# EAGLE board Tiny2 (EAGLE 8.3.2)
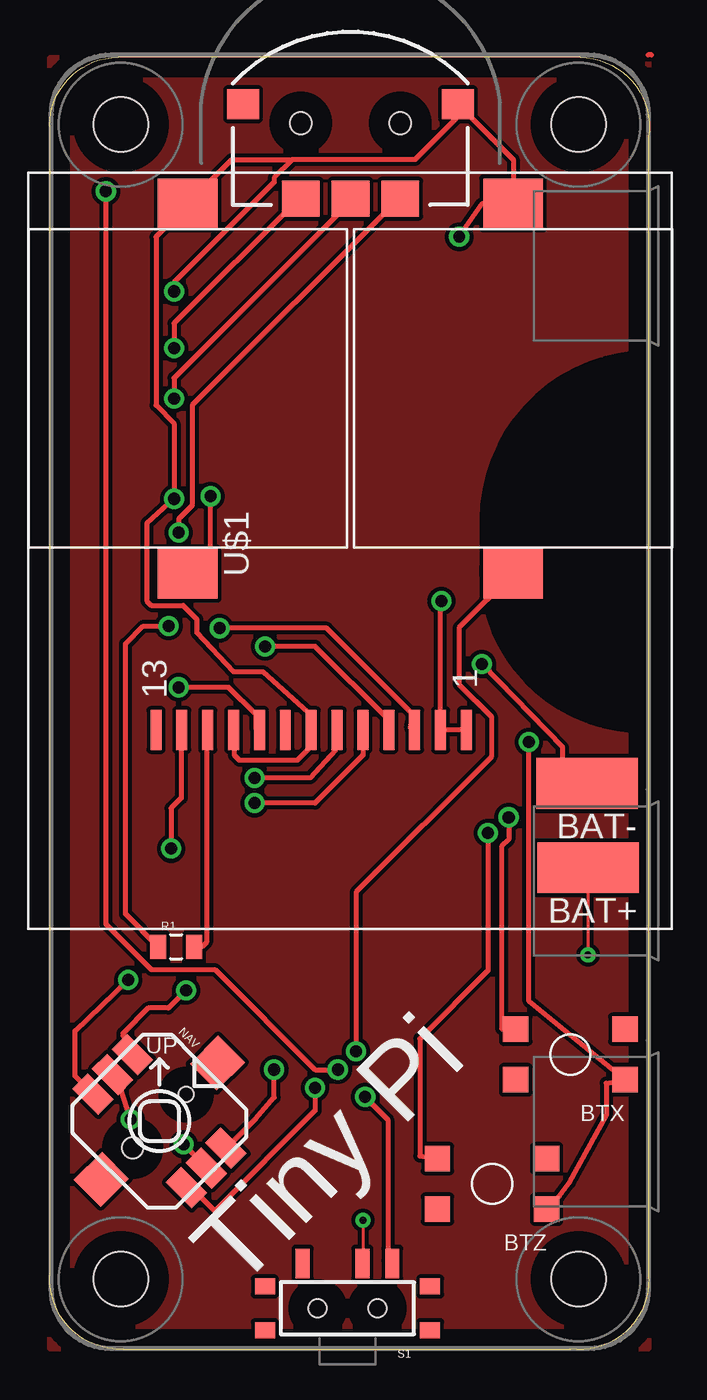
[diagram p0: board, top side]
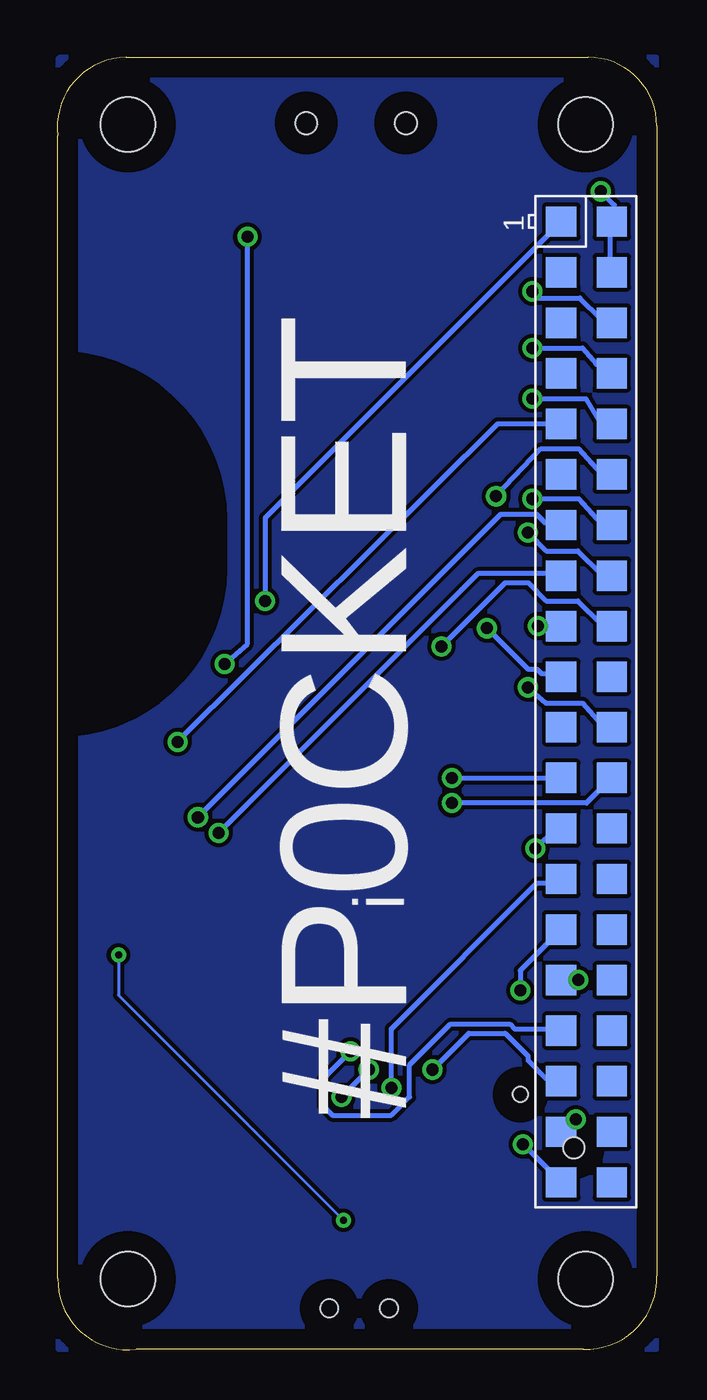
[diagram p1: board, bottom side, seen from below]

Size 30.12 x 64.92 mm. Coordinates in mm from the lower left corner, seen from the top.
Outline: 3.68,0.03 26.16,0.03 arc98 30.1,3.58 30.1,60.99 arc96 26.67,64.92 3.43,64.92 arc90 0,61.49 0,3.71 arc94 3.68,0.03
Copper layers (1*16): Top 0.035mm / dielectric 1.5mm / Bottom 0.035mm
Design rules "default *": minimum track width 10mil, minimum drill 24mil, track to track 8mil, track to pad 8mil, pad to pad 8mil, via to via 8mil, smd to smd 8mil, copper to edge 40mil, drill to drill 8mil, minimum pad ring 10mil, minimum via ring 8mil, stop-mask expansion 4mil, vias tented up to drill 25mil, thermal gap 10mil

## Footprints (pad centres in the part's own frame; a part is rotated, then mirrored left to right if it is on the bottom)
SMD2,54-5,08 = smd 2.54 x 5.08: 1 0,0
7914G = smd 1.27 x 1.27: 1 0,0; 2 0,5.486; 3 2.54,0; 4 2.54,5.486
JOYSTICK_MINI = smd 1.85 x 1.1: A -3.325,1.4; B 3.325,1.4; C -3.325,-1.4; CTR -3.325,0; D 3.325,-1.4; GND 3.325,0 | smd 1.9 x 2: NC 0,4.13; NC@0 0,-4.13 | hole 0.75: 0,1.9 | hole 1.05: 0,-1.9
RASPBERRYPI_BASTELSTUBE_V13_RASPI_BOARD_B+_FULL = smd 1.524 x 1.524: 1 8.382,25.273; 2 8.382,27.813; 3 10.922,25.273; 4 10.922,27.813; 5 13.462,25.273; 6 13.462,27.813; 7 16.002,25.273; 8 16.002,27.813; 9 18.542,25.273; 10 18.542,27.813; 11 21.082,25.273; 12 21.082,27.813; 13 23.622,25.273; 14 23.622,27.813; 15 26.162,25.273; 16 26.162,27.813; 17 28.702,25.273; 18 28.702,27.813; 19 31.242,25.273; 20 31.242,27.813; 21 33.782,25.273; 22 33.782,27.813; 23 36.322,25.273; 24 36.322,27.813; 25 38.862,25.273; 26 38.862,27.813; 27 41.402,25.273; 28 41.402,27.813; 29 43.942,25.273; 30 43.942,27.813; 31 46.482,25.273; 32 46.482,27.813; 33 49.022,25.273; 34 49.022,27.813; 35 51.562,25.273; 36 51.562,27.813; 37 54.102,25.273; 38 54.102,27.813; 39 56.642,25.273; 40 56.642,27.813 | hole 2.75: 3.5,3.5; 3.5,26.5; 61.5,3.5; 61.5,26.5
0805 = smd 0.8 x 1.2: 1 -0.9,0; 2 0.9,0
KPS-1290 = smd 0.7 x 1.5: O -2.25,2.25; P 0.75,2.25; S 2.25,2.25 | smd 1 x 0.8: P$1 -4.15,1.1; P$2 -4.15,-1.1; P$3 4.15,-1.1; P$4 4.15,1.1 | hole 0.9: -1.5,0; 1.5,0
BUZZER-CMT1603 = smd 2.5 x 3: P$1 -9.3,0; P$2 9.3,0
ST7735S-1.44 = smd 2 x 0.55: P$1 -9,-5.85; P$2 -9,-4.55; P$3 -9,-3.25; P$4 -9,-1.95; P$5 -9,-0.65; P$6 -9,0.65; P$7 -9,1.95; P$8 -9,3.25; P$9 -9,4.55; P$10 -9,5.85; P$11 -9,7.15; P$12 -9,8.45; P$13 -9,9.75
NAV_SWITCH = smd 1.9 x 1.8: 1 -2.5,-3.8; 2 2.5,-3.8; T 0,-3.8 | smd 1.6 x 1.5: C 5.4,0.95; NC -5.4,0.95 | hole 1.1: -2.5,0; 2.5,0

## Placement (x,y rotation side)
BAT+  [SMD2,54-5,08]  27.05,24.21 90 top
BAT-  [SMD2,54-5,08]  27,28.45 90 top
BTX  TACTILE-SWITCH-7914G  [7914G]  28.91,13.56 90 top
BTZ  TACTILE-SWITCH-7914G  [7914G]  24.97,7.06 90 top
NAV  [JOYSTICK_MINI]  5.51,11.48 315 top
PI1  RPI-ZERO  [RASPBERRYPI_BASTELSTUBE_V13_RASPI_BOARD_B+_FULL]  30.07,65.05 270 bottom
R1  [0805]  6.35,20.24 0 top
S1  SWITCH_SPDT  [KPS-1290]  14.96,2.08 0 top
SG1  BUZZERSMD  [BUZZER-CMT1603]  6.93,48.29 90 top
SG2  BUZZERSMD  [BUZZER-CMT1603]  23.29,48.29 90 top
U$1  ST7735S-1.44  [ST7735S-1.44]  15.09,40.13 90 top
U$2  NAV_SWITCHSMD  [NAV_SWITCH]  15.11,61.62 0 top

## Library data of the parts
BAT+ BAT- = wirepad
BTX BTZ = GeekAmmo
NAV = SparkFun-Electromechanical; PROD_ID: SWCH-09905
PI1 = RPI-Zero
R1 = SparkFun-Resistors
S1 = SparkFun-Electromechanical; PROD_ID: SWCH-10651
SG1 SG2 = SparkFun-Electromechanical
U$1 = ST7735S
U$2 = SparkFun-Electromechanical; PROD_ID: SWCH-08301

## Nets
3V3@1: PI1.1 U$1.P$1 U$1.P$2
3V3@2: PI1.17 R1.1
5V0@2: PI1.2 PI1.4 S1.S
GND@1: BTX.1 BTZ.1 PI1.9
GND@2: PI1.25 U$1.P$12
GND@3: NAV.GND PI1.39
GND@8: BAT-.1 PI1.6 SG1.P$2 SG2.P$2 U$1.P$7 U$1.P$10 U$2.C
N$1: PI1.22 U$1.P$9
N$2: PI1.23 U$1.P$6
N$3: PI1.19 U$1.P$3
N$4: NAV.CTR PI1.37
N$5: NAV.B PI1.35
N$6: PI1.18 U$1.P$4
N$7: PI1.24 U$1.P$5
N$8: NAV.C PI1.31
N$9: NAV.A PI1.29
N$10: NAV.D PI1.27
N$11: BTZ.4 PI1.15
N$12: BTX.4 PI1.13
N$13: PI1.12 SG1.P$1
N$14: R1.2 U$1.P$11
N$15: PI1.33 SG2.P$1
N$16: PI1.8 U$2.1
N$17: PI1.10 U$2.T
N$18: PI1.16 U$2.2
N$20: BAT+.1 S1.P

## Tracks (layer width: path | path; a pad name or v marks a point on that pad's centre or on a via)
3V3@1  (via drill 0.6)
  Top 0.254: v19.69,37.62 19.64,37.57 U$1.P$2 U$1.P$1
  Bottom 0.254: PI1.1 19.69,41.78 v19.69,37.62
3V3@2  (via drill 0.6)
  Top 0.254: R1.1 3.81,21.88 3.81,35.46 4.7,36.35 v5.97,36.35
  Bottom 0.254: v5.97,36.35 PI1.17
5V0@2  (via drill 0.61)
  Top 0.254: v15.85,12.7 16.99,11.56 16.99,4.47 S1.S | v14.48,14.07 13.33,14.07 8.31,19.1 5.11,19.1 2.82,21.39 v2.82,58.19
  Bottom 0.254: v14.48,14.07 v15.85,12.7 | v2.82,58.19 2.13,57.51 2.13,56.82 PI1.2 2.36,56.59 2.36,54.31 PI1.4
GND@1  (via drill 0.61)
  Top 0.254: BTZ.1 25.6,7.72 26.11,8.41 27.97,11.79 27.97,13.39 BTX.1 24.08,17.5 v24.08,30.53
  Bottom 0.254: 4.88,46.53 PI1.9 8,46.51 23.9,30.73 | 23.9,30.73 24.08,30.43 | v24.08,30.53 23.9,30.73
GND@2  (via drill 0.6)
  Top 0.254: U$1.P$12 6.6,31.1 6.6,27.71 6.1,27.2 v6.1,25.17
  Bottom 0.254: v6.1,25.17 5.08,26.19 PI1.25
GND@3  (via drill 0.6)
  Top 0.254: v6.73,10.31 7.86,9.18 NAV.GND
  Bottom 0.254: PI1.39 6.71,10.31 v6.73,10.31
GND@8  (via drill 0.6, 0.61)
  Top 0.254: v6.25,53.16 6.25,53.62 11.28,58.65 11.28,58.88 12.19,59.79 | 12.19,59.79 18.36,59.79 20.42,61.85 | 20.42,61.85 20.42,62.53 U$2.C | 20.42,61.85 U$2.C | 12.19,59.79 9.14,59.79 SG1.P$2 6.93,57.51 5.33,55.91 5.33,47.45 6.25,46.53 v6.25,42.75 4.88,41.5 4.88,37.62 5.11,37.39 6.71,37.39 7.39,36.7 7.39,36.02 9.22,34.06 10.72,34.06 13.23,31.8 13.11,31.22 U$1.P$7 13.14,30.31 12.45,29.62 9.53,29.62 9.27,29.87 9.27,31.1 U$1.P$10 | 23.39,57.68 SG2.P$2 | BAT-.1 25.78,29.67 25.78,30.25 v21.72,34.44 | v20.57,55.91 21.75,57.59 SG2.P$2 | U$2.C 23.29,59.79 SG2.P$2
  Bottom 0.254: v6.25,53.16 5.92,52.83 3.86,52.83 2.82,51.79 2.36,51.79 PI1.6 | 2.36,41.5 2.82,41.5 3.94,42.75 v6.25,42.75 | v21.72,34.44 20.57,35.46 v20.57,55.91
N$1  (via drill 0.61)
  Top 0.254: v6.48,33.27 8.99,33.27 10.36,31.9 10.36,31.22 U$1.P$9
  Bottom 0.254: v6.48,33.27 5.56,32.49 3.73,32.49 2.82,31.45 2.36,31.45 PI1.22
N$2  (via drill 0.6)
  Top 0.254: U$1.P$6 14.35,31.05 14.35,30.12 13.08,28.73 v10.29,28.73
  Bottom 0.254: v10.29,28.73 PI1.23
N$3  (via drill 0.61)
  Top 0.254: v8.53,36.25 13.92,36.25 18.26,31.9 18.14,31.22 U$1.P$3
  Bottom 0.254: v8.53,36.25 6.48,34.19 6.02,34.19 5.79,33.96 4.88,33.96 PI1.19
N$4  (via drill 0.6)
  Top 0.254: v4.06,11.58 3.56,13.11 3.21,13.83 NAV.CTR
  Bottom 0.254: PI1.37 3.81,11.81 v4.06,11.58
N$5  (via drill 0.61)
  Top 0.254: v11.28,14.07 11.28,12.67 10.34,11.61 NAV.B
  Bottom 0.254: v11.28,14.07 9.45,15.9 7.62,15.9 6.48,14.76 6.48,14.53 5.56,13.61 4.88,13.61 PI1.35
N$6  (via drill 0.61)
  Top 0.254: v10.82,35.33 13.33,35.33 16.99,31.67 16.99,31.22 U$1.P$4
  Bottom 0.254: v10.82,35.33 7.62,38.53 6.48,38.53 5.56,37.62 3.96,37.62 2.82,36.47 2.36,36.47 PI1.18
N$7  (via drill 0.6)
  Top 0.254: U$1.P$5 15.75,31.12 15.75,29.87 13.33,27.46 v10.29,27.46
  Bottom 0.254: PI1.24 3.53,27.46 v10.29,27.46
N$8  (via drill 0.6)
  Top 0.254: NAV.C 1.27,13.74 1.27,16.03 v3.94,18.57
  Bottom 0.254: v3.94,18.57 PI1.31
N$9  (via drill 0.6)
  Top 0.254: v6.86,18.06 5.97,17.17 4.95,17.17 3.68,15.9 3.68,15.77 4.15,15.31 NAV.A
  Bottom 0.254: PI1.29 6.86,19.05 v6.86,18.06
N$10  (via drill 0.61)
  Top 0.254: v13.33,13.16 13.33,12.01 8.33,7.01 8.26,7.01 7.13,8.14 NAV.D
  Bottom 0.254: v13.33,13.16 13.33,16.13 6.02,23.44 4.88,23.44 PI1.27
N$11  (via drill 0.61)
  Top 0.254: v22.02,25.96 22.02,19.05 18.59,15.62 18.59,9.73 BTZ.4
  Bottom 0.254: v22.02,25.96 8.99,38.99 4.88,38.99 PI1.15
N$12  (via drill 0.61)
  Top 0.254: v23.06,26.75 23.06,25.63 22.71,25.27 22.71,16.13 BTX.4
  Bottom 0.254: v23.06,26.75 7.85,41.96 6.02,41.96 5.56,41.5 4.88,41.5 PI1.13
N$13  (via drill 0.61)
  Top 0.254: v8.08,42.88 8.08,40.13 SG1.P$1
  Bottom 0.254: v8.08,42.88 5.82,45.26 3.94,45.26 2.82,44.02 2.36,44.02 PI1.12
N$14
  Top 0.254: U$1.P$11 7.87,31.07 7.87,20.47 7.64,20.24 R1.2
N$15  (via drill 0.61)
  Top 0.254: v15.39,14.99 15.39,22.99 22.19,29.78 22.19,31.81 20.57,33.43 20.57,36.27 SG2.P$1 23.16,38.76
  Bottom 0.254: v15.39,14.99 16.76,13.61 16.76,12.24 16.31,11.79 13.33,11.79 12.42,12.7 12.42,14.3 10.36,16.36 7.39,16.36 7.16,16.13 4.88,16.13 PI1.33
N$16  (via drill 0.61)
  Top 0.254: v6.25,50.32 6.25,51.56 12.42,57.73 U$2.1
  Bottom 0.254: v6.25,50.32 3.73,50.32 3.05,49.5 2.82,49.5 2.36,49.05 PI1.8
N$17  (via drill 0.61)
  Top 0.254: v6.25,47.78 6.25,48.82 15.16,57.73 U$2.T
  Bottom 0.254: v6.25,47.78 3.56,47.78 2.82,46.53 2.36,46.53 PI1.10
N$18  (via drill 0.61)
  Top 0.254: v6.48,41.05 6.48,41.73 7.16,42.42 7.16,47.45 17.45,57.73 U$2.2
  Bottom 0.254: v6.48,41.05 5.56,40.13 3.96,40.13 2.82,38.99 2.36,38.99 PI1.16
N$19
  pour Bottom: 30.1,50.32 arc90 21.46,41.68 21.46,39.27 arc90 30.1,30.63 30.1,0.03 0,0.03 0,64.92 29.97,64.92 arc-90 30.1,64.8
N$20  (via drill 0.35)
  Top 0.152: BAT+.1 v27.05,19.84 | v15.75,6.5 15.75,4.37 S1.P
  Bottom 0.152: v27.05,19.84 27.05,17.81 v15.75,6.5
N$22
  Top 0.254: 30.25,65.05 30.07,65.05
N$25
  pour Top: 30.1,50.32 arc90 21.46,41.68 21.46,39.78 arc90 29.21,30.89 30.1,30.63 30.1,0.03 0,0.03 0,64.92 30.1,64.92

## Text on the board
tNames: Tiny Pi
bNames: i | #P0CKET